# Altium PCB main.PcbDoc (part 2 of 2)
Units mm, origin at the board's own origin, x right, y up, seen from the top; angles counter-clockwise.
Board outline 50 x 70 mm, 6 copper layers (Layer 1 SIG, Layer 2 GND, Layer 3 SIG PWR, Layer 4 SIG PWR, Layer 5 GND, Layer 6 SIG), stack 1.546 mm thick; 153 components, 145 nets, 599 pads, 426 vias.
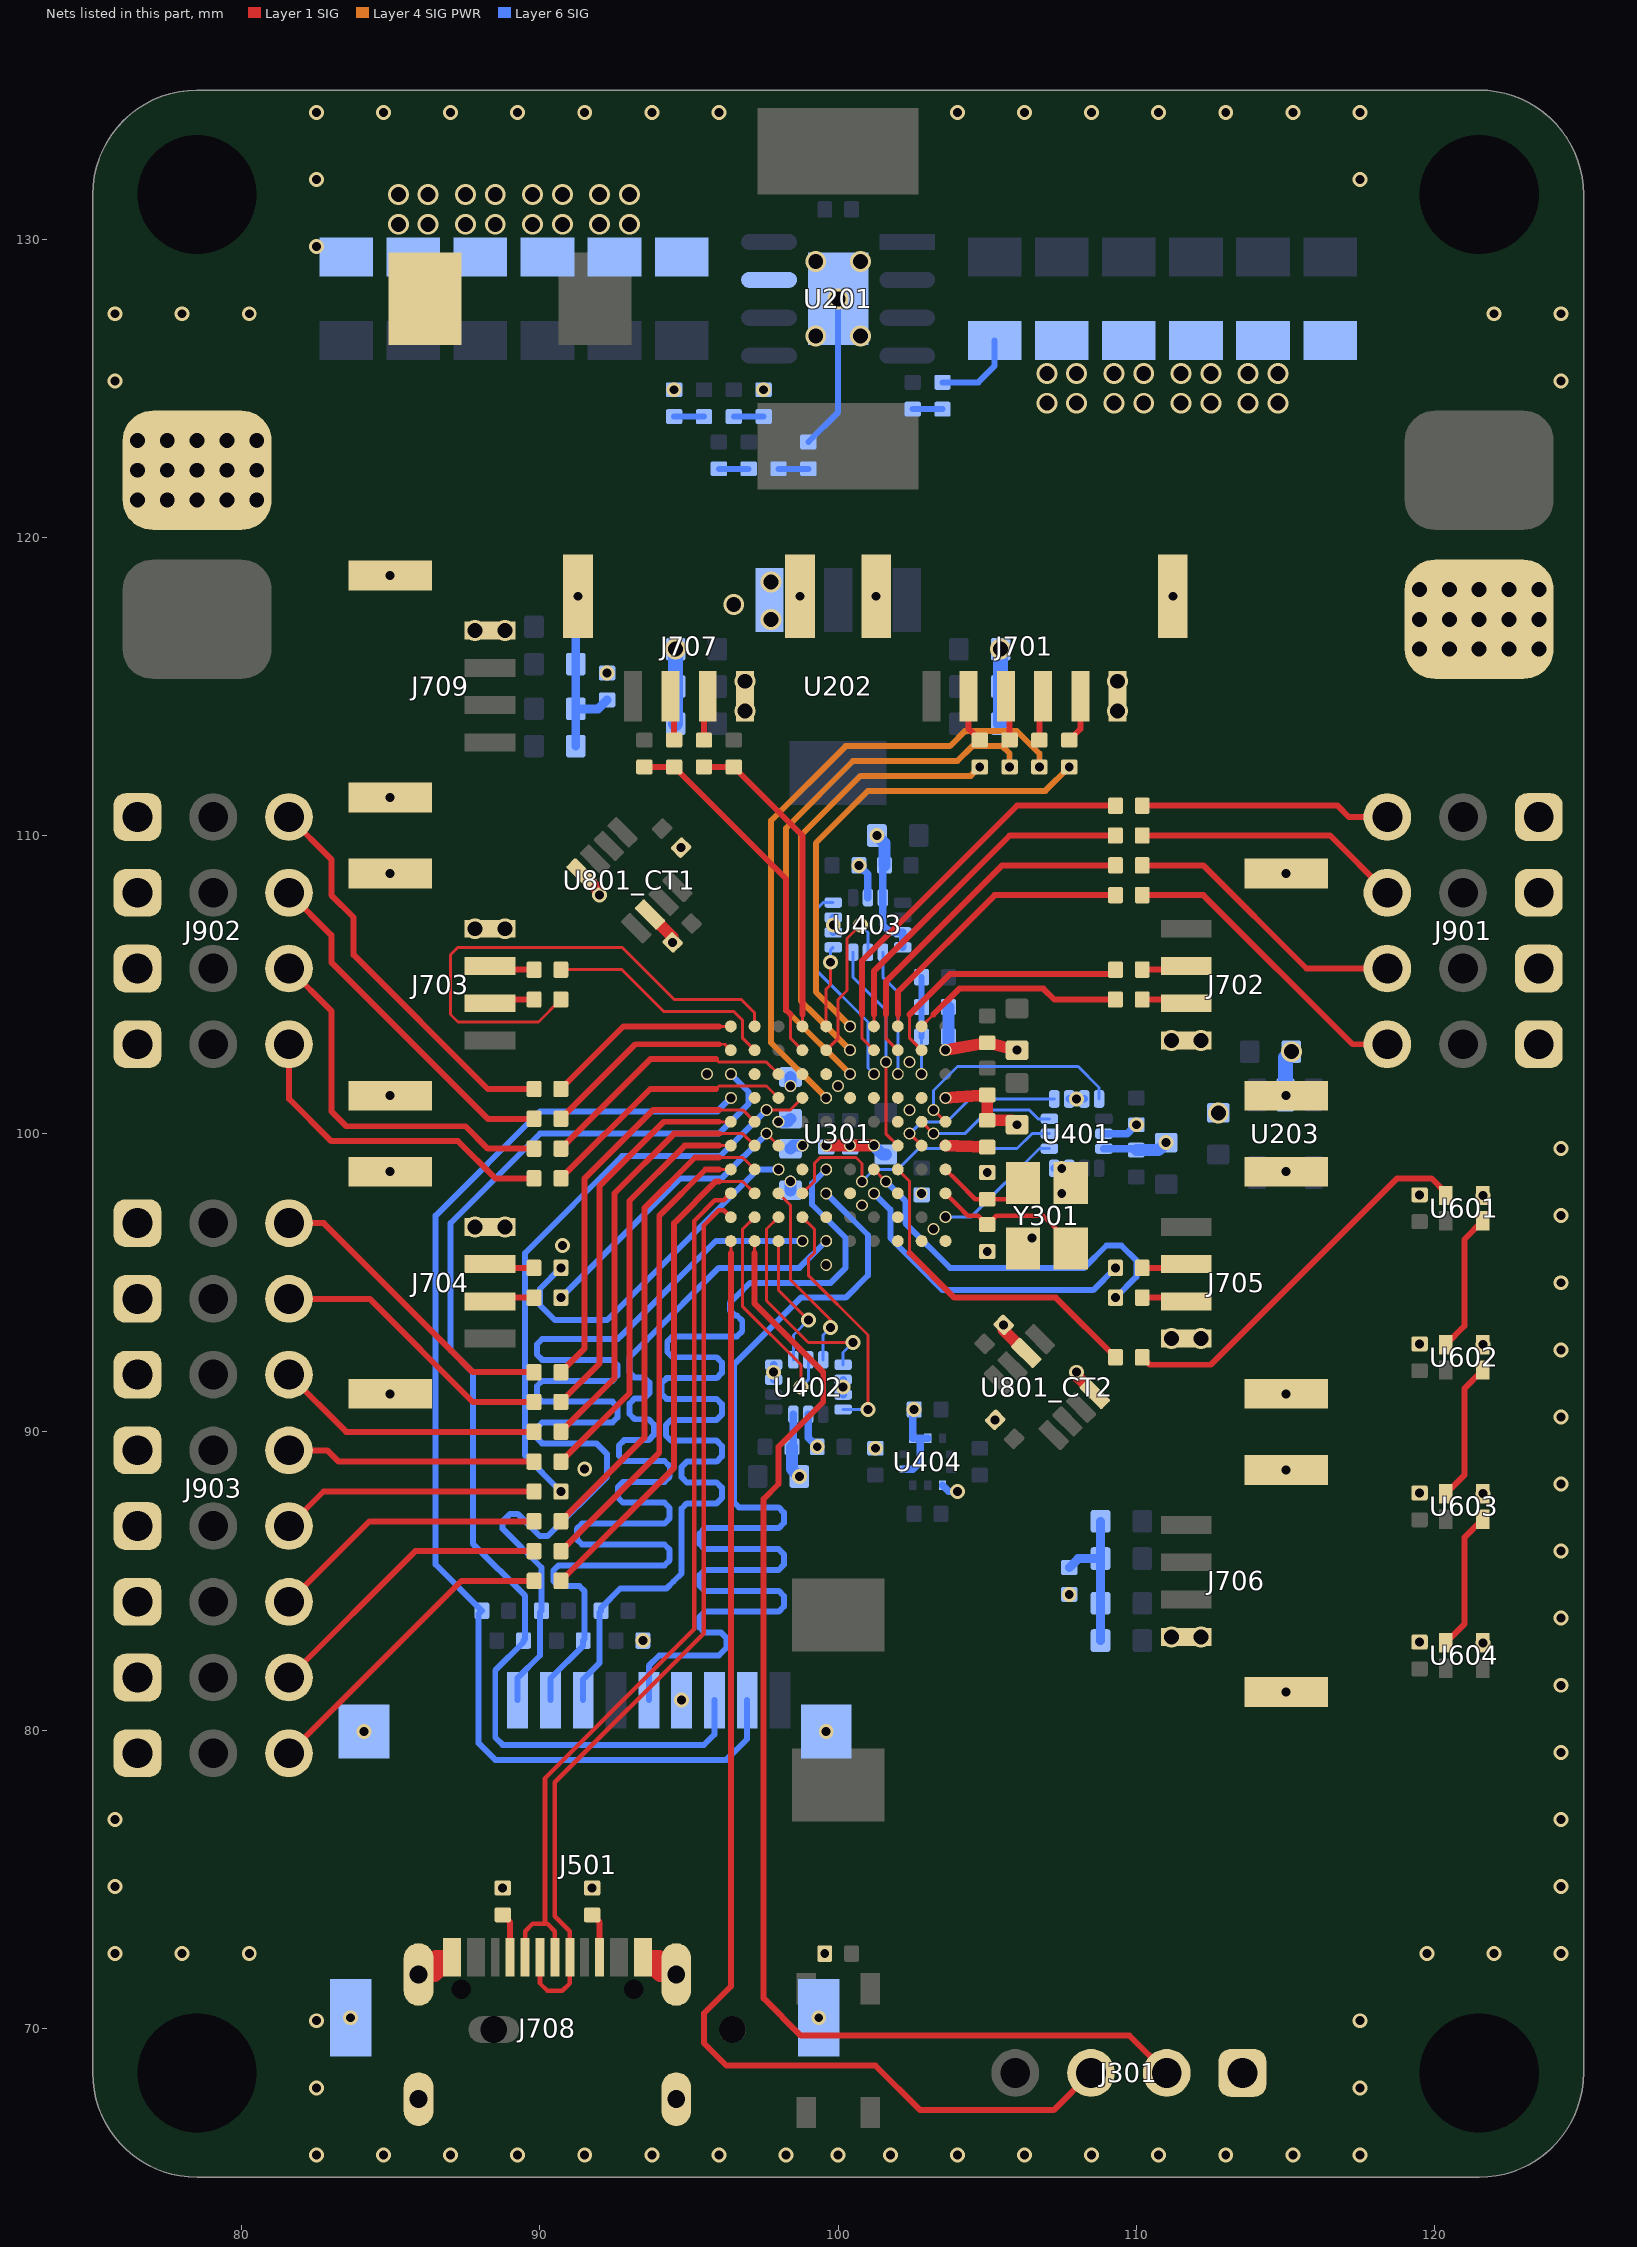
[diagram p6: the nets of this part, all layers, seen from the top]

## Via types
v1: diameter 0.5/0/0/0/0/0.5 (per signal layer), hole 0.3, Layer 1 SIG to Layer 6 SIG, tented both sides, 192 vias
v2: diameter 0.7/0/0/0/0/0.7 (per signal layer), hole 0.5, Layer 1 SIG to Layer 6 SIG, tented both sides, 185 vias
v3: diameter 0.4/0/0/0/0/0.4 (per signal layer), hole 0.3, Layer 1 SIG to Layer 6 SIG, tented both sides, 41 vias
v4: diameter 0.5/0/0/0.5/0/0.5 (per signal layer), hole 0.3, Layer 1 SIG to Layer 6 SIG, tented both sides, 4 vias
v5: diameter 0.4/0/0/0.4/0/0.4 (per signal layer), hole 0.3, Layer 1 SIG to Layer 6 SIG, tented both sides, 4 vias

## Nets (pads, with @x,y where several pads share a name; then routed paths per layer and width w, separated by ;. In a path a pad name is that pad's centre, name@x,y a point inside that pad or via, vN(x,y) a via of type N, cw(c..) or ccw(c..) an arc to the next point about the centre after c; other vN are vias at no path point) (continued)
GND: C201.2 C203.2 C204.2 C205.2 C206.2 C207.2 C208.2 C209.2 C210.2 C211.2 C212.2 C213.2 C214.2 C216.2 C217.2 C218.2 C219.2 C220.2 C221.2 C222.2 C223.2 C224.2 C225.2 C301.2 C302.2 C303.2 C304.2 C305.2 C306.2 C307.2 C308.2 C309.2 C310.2 C311.2 C312.2 C313.2 C401.2 C402.2 C403.2 C404.2 C405.2 C406.2 C407.2 C408.2 C409.2 C410.2 C411.2 C501.2 C601.2 C602.2 C603.2 C604.2 C801_CT1.2 C801_CT2.2 C802_CT1.2 C802_CT2.2 C803_CT1.2 C803_CT2.2 D202.2 J301.1 J501.6 J501.10 J501.11 J501.12 J501.13 J701.6 J701.7 J701.8 J702.4 J702.5 J702.6 J703.4 J703.5 J703.6 J704.4 J704.5 J704.6 J705.4 J705.5 J705.6 J706.4 J706.5 J706.6 J707.4 J707.5 J707.6 J708.1 J708.2 J708.3 J708.4 J708.A1B12 J708.B1A12 J709.4 J709.5 J709.6 J901.1 J901.4 J901.7 J901.10 J902.1 J902.4 J902.7 J902.10 J903.1 J903.4 J903.7 J903.10 J903.13 J903.16 J903.19 J903.22 pad.PW@78.5,122.25 pad.PW@121.5,117.25 R202.2 R207.2 R209.2 R301.2 R717.2 R718.2 U201.7 U201.9 U202.1 U203.2 U301.C2 U301.E4 U301.E5 U301.E6 U301.G1 U301.J1 U401.2 U401.3 U401.6 U401.7 U401.10 U401.11 U402.2 U402.3 U402.6 U402.7 U402.10 U402.11 U403.2 U403.3 U403.6 U403.7 U403.10 U403.11 U404.3 U404.6 U404.8 U404.9 U601.3 U602.3 U603.3 U604.3 U801_CT1.2 U801_CT1.8 U801_CT2.2 U801_CT2.8 Y301.2 Y301.4 | length 52.9
  Layer 1 SIG w0.4: U801_CT1.8@91.391,108.73 92,108.121 v1(92,108) ; U801_CT1.2@93.689,107.351 94.45,106.591 v1(94.45,106.414) ; v3(99.6,99.6) v3(100.4,99.6) v3(101.2,99.6) ; v3(103.6,101.2) 104,101.229 C307.2@105,101.3 C311.2@105,100.45 105.85,100.45 v1(106,100.3) ; v3(103.6,102.8) 104,102.871 C304.2@105,103.05 v1(106,102.8) ; v1(105.55,93.586) 105.55,93.409 U801_CT2.2@106.311,92.649 ; v1(108,92) 108,91.879 U801_CT2.8@108.609,91.27
  Layer 1 SIG w0.5: J708.1@85.93,71.801 86.508,72.379 J708.A1B12@87.05,72.379 86.472,71.801 J708.1@85.93,71.801 ; J708.B1A12@93.45,72.379 94.028,71.801 J708.2@94.57,71.801 93.992,72.379 J708.B1A12@93.45,72.379
  Layer 6 SIG w0.2: R209.2@99,123.2 100,124.2 v2(100,128) ; R207.2@103.5,125.2 104.7,125.2 105.25,125.75 C203.2@105.25,126.6
  Layer 6 SIG w0.25: U402.10@97.835,91.75 U402.11@97.835,92.25 ; C404.2@98.45,89.5 98.5,89.55 U402.7@98.5,90.585 ; U402.6@99,90.585 99,89.8 v1(99.3,89.5) ; U403.2@99.835,106.75 U403.3@99.835,107.25 ; U402.3@100.165,91.25 U402.2@100.165,91.75 ; v1(100.7,109) 101,108.7 U403.6@101,107.915 ; C407.2@101.55,109 101.5,108.95 U403.7@101.5,107.915 101.5,107 101.75,106.75 U403.10@102.165,106.75 U403.11@102.165,106.25 ; U404.6@102.213,88.75 102.5,88.75 102.75,89 102.75,89.787 ; v1(102.55,90.75) 102.5,90.75 U404.8@102.5,89.787 102.75,89.787 ; U404.9@103,89.787 102.75,89.787 ; U404.3@103.5,88.213 103.713,88 v1(104,88) ; U401.11@107.25,98.835 U401.10@107.75,98.835 ; U401.2@107.75,101.165 U401.3@108.25,101.165 ; U401.7@108.915,99.5 109.95,99.5 C401.2@110,99.45 ; U401.6@108.915,100 109.7,100 v1(110,100.3)
  Layer 6 SIG w0.4: C309.2@98.4,98.1 v3(98.4,98.4) ; v3(98.4,101.6) C310.2@98.4,101.9 ; C404.2@98.45,89.5 98.45,88.75 v1(98.7,88.5) ; v3(101.2,99.6) 101.5,99.3 C308.2@101.6,99.3 ; v1(101.3,110) 101.55,109.75 C407.2@101.55,109 ; v3(103.6,102.8) 103.7,102.9 C201.2@103.7,103.25 R202.2@103.7,104.25 ; C401.2@110,99.45 110.75,99.45 v1(111,99.7)
  Layer 6 SIG w0.5: C223.2@94.55,113.75 C222.2@94.55,115 v2(94.55,116.25) ; C218.2@105.45,113.75 v2(105.45,116.25) ; U203.2@115,101.3 115,102.55 v2(115.2,102.75)
  other v1: 82.5,65.75 84.75,65.75 87,65.75 89.25,65.75 91.5,65.75 93.75,65.75 96,65.75 98.25,65.75 100,65.75 101.75,65.75 104,65.75 106.25,65.75 108.5,65.75 110.75,65.75 113,65.75 115.25,65.75 117.5,65.75 82.5,68 117.5,68 82.5,70.25 117.5,70.25 83.65,70.35 99.35,70.35 75.75,72.5 78,72.5 80.25,72.5 99.55,72.5 119.75,72.5 122,72.5 124.25,72.5 88.75,74.7 91.75,74.7 75.75,74.75 124.25,74.75 75.75,77 124.25,77 124.25,79.25 84.1,79.95 99.6,79.95 94.75,81 115.025,81.275 124.25,81.5 121.625,82.925 119.5,82.95 93.45,83 124.25,83.75 107.75,84.55 124.25,86 121.625,87.925 119.5,87.95 124.25,88.25 115.025,88.725 91.5,88.75 101.25,89.45 105.268,90.404 124.25,90.5 84.975,91.275 115.025,91.275 100.165,91.5 97.835,92 124.25,92.75 121.625,92.925 119.5,92.95 124.25,95 105,96.05 90.75,96.25 106.5,96.5 124.25,97.25 121.625,97.925 119.5,97.95 107.5,98 105,98.7 84.975,98.725 115.025,98.725 107.5,98.835 124.25,99.5 108,101.165 84.975,101.275 115.025,101.275 99.835,107 84.975,108.725 115.025,108.725 94.732,109.596 84.975,111.275 92.25,115.45 91.275,118.025 98.725,118.025 101.275,118.025 111.225,118.025 84.975,118.725 94.5,124.95 97.5,124.95 75.75,125.25 124.25,125.25 75.75,127.5 78,127.5 80.25,127.5 122,127.5 124.25,127.5 82.5,129.75 82.5,132 117.5,132 82.5,134.25 84.75,134.25 87,134.25 89.25,134.25 91.5,134.25 93.75,134.25 96,134.25 104,134.25 106.25,134.25 108.5,134.25 110.75,134.25 113,134.25 115.25,134.25 117.5,134.25
  other v2: 111.175,83.125 112.175,83.125 111.175,93.125 112.175,93.125 87.825,96.875 88.825,96.875 112.75,100.7 111.175,103.125 112.175,103.125 87.825,106.875 88.825,106.875 96.875,114.175 109.375,114.175 96.875,115.175 109.375,115.175 119.5,116.25 120.5,116.25 121.5,116.25 122.5,116.25 123.5,116.25 87.825,116.875 88.825,116.875 97.75,117.25 119.5,117.25 120.5,117.25 121.5,117.25 122.5,117.25 123.5,117.25 96.5,117.75 119.5,118.25 120.5,118.25 121.5,118.25 122.5,118.25 123.5,118.25 97.75,118.5 76.5,121.25 77.5,121.25 78.5,121.25 79.5,121.25 80.5,121.25 76.5,122.25 77.5,122.25 78.5,122.25 79.5,122.25 80.5,122.25 76.5,123.25 77.5,123.25 78.5,123.25 79.5,123.25 80.5,123.25 107,124.5 108,124.5 109.25,124.5 110.25,124.5 111.5,124.5 112.5,124.5 113.75,124.5 114.75,124.5 107,125.5 108,125.5 109.25,125.5 110.25,125.5 111.5,125.5 112.5,125.5 113.75,125.5 114.75,125.5 99.25,126.75 100.75,126.75 99.25,129.25 100.75,129.25 85.25,130.5 86.25,130.5 87.5,130.5 88.5,130.5 89.75,130.5 90.75,130.5 92,130.5 93,130.5 85.25,131.5 86.25,131.5 87.5,131.5 88.5,131.5 89.75,131.5 90.75,131.5 92,131.5 93,131.5
  other v3: 99.6,95.6 103.2,96.8 100.8,97.6 102.8,98 102.4,100.8 100,101.6 95.6,102 102.4,102.4
HSE_IN: C312.1 U301.C1 Y301.1 | length 5.3
  Layer 1 SIG w0.15: U301.C1@103.6,98 104,97.6 104.35,97.25 104.7,97.25 C312.1@105,96.95 105.3,97.25 106.872,97.25 107.8,96.322 Y301.1@107.8,96.15
HSE_OUT: C313.1 U301.D1 Y301.3 | length 3.2
  Layer 1 SIG w0.15: U301.D1@103.6,98.8 104,98.4 104.6,97.8 C313.1@105,97.8 105.65,97.8 Y301.3@106.2,98.35
I2C2.SCL: R713.2 R715.1 U301.J7 | length 12.3
  Layer 1 SIG w0.1: 98.4,104 98.4,103.2 U301.J7@98.8,102.8
  Layer 1 SIG w0.2: R713.2@93.5,112.3 R715.1@94.5,112.3 98.25,108.55 98.25,104.15 98.4,104
I2C2.SDA: R714.2 R716.1 U301.K7 | length 10.7
  Layer 1 SIG w0.1: U301.K7@98.8,103.6 98.8,104
  Layer 1 SIG w0.2: R716.1@95.5,112.3 R714.2@96.5,112.3 98.8,110 98.8,104
IMU1_SPI2.CS: U301.B1 U401.12 | length 4.4
  Layer 6 SIG w0.1: v3(103.6,97.2) 104,97.2 104.45,97.2 106.75,99.5 U401.12@107.085,99.5
IMU1_SPI2.INT: U301.F1 U401.4 | length 7.8
  Layer 1 SIG w0.1: v3(103.2,100.8) U301.F1@103.6,100.4
  Layer 6 SIG w0.1: v3(103.2,100.8) 103.2,101.45 104,102.25 108.05,102.25 108.75,101.55 U401.4@108.75,101.165
IMU1_SPI2.MISO: U301.E2 U401.1 | length 5.9
  Layer 1 SIG w0.1: v3(102.4,100) U301.E2@102.8,99.6
  Layer 6 SIG w0.1: v3(102.4,100) 102.8,100.4 103.65,100.4 104,100.75 104.415,101.165 U401.1@107.25,101.165
IMU1_SPI2.MOSI: U301.F2 U401.14 | length 4.9
  Layer 1 SIG w0.1: U301.F2@102.8,100.4 v3(103.2,100)
  Layer 6 SIG w0.1: v3(103.2,100) 104,100 104.25,100 105.05,100.8 106.4,100.8 106.7,100.5 U401.14@107.085,100.5
IMU1_SPI2.SCK: U301.C7 U401.13 | length 10.5
  Layer 1 SIG w0.1: U301.C7@98.8,98 99.2,98.4 99.2,99 99.4,99.2 100.6,99.2 100.8,99 v3(100.8,98.4)
  Layer 6 SIG w0.1: v3(100.8,98.4) 101.2,98.8 102,98.8 102.7,99.5 104,99.5 106,99.5 106.5,100 U401.13@107.085,100
IMU2_SPI3.CS: U301.A8 U402.12 | length 4.6
  Layer 1 SIG w0.1: U301.A8@98,96.4 98,94.75 v1(99,93.75)
  Layer 6 SIG w0.1: U402.12@98.5,92.415 98.5,93.25 v1(99,93.75)
IMU2_SPI3.INT: U301.B7 U402.4 | length 8.4
  Layer 1 SIG w0.1: U301.B7@98.8,97.2 99.2,96.8 99.2,96 99,95.8 99,95.25 101,93.25 v1(101,90.75)
  Layer 6 SIG w0.1: U402.4@100.165,90.75 v1(101,90.75)
IMU2_SPI3.MISO: U301.B8 U402.1 | length 7.3
  Layer 1 SIG w0.1: U301.B8@98,97.2 97.6,96.8 97.6,94.4 99,93 v1(100.5,93)
  Layer 6 SIG w0.1: U402.1@100.165,92.25 100.165,92.665 v1(100.5,93)
IMU2_SPI3.MOSI: U301.C8 U402.14 | length 6.4
  Layer 1 SIG w0.1: U301.C8@98,98 98.4,97.6 98.4,95.1 99.75,93.75 v1(99.75,93.5)
  Layer 6 SIG w0.1: U402.14@99.5,92.415 99.5,93.25 v1(99.75,93.5)
IMU2_SPI3.SCK: U301.B9 U402.13 | length 7.7
  Layer 1 SIG w0.1: U301.B9@97.2,97.2 96.8,96.8 96.8,96 96.8,94.2 98.75,92.25 v1(98.75,91.5)
  Layer 6 SIG w0.1: v1(98.75,91.5) 99,91.75 U402.13@99,92.415
IMU3_SPI4.CS: U301.H3 U403.12 | length 4.3
  Layer 6 SIG w0.1: U403.12@101.5,106.085 101.5,105.25 102,104.75 102,104 v3(102,102)
IMU3_SPI4.INT: U301.H4 U403.4 | length 7
  Layer 6 SIG w0.1: U403.4@99.835,107.75 99.5,107.75 99.2,107.45 99.2,105.55 101,103.75 101,102.2 v3(101.2,102)
IMU3_SPI4.MISO: U301.K6 U403.1 | length 2.7
  Layer 1 SIG w0.1: U301.K6@99.6,103.6 99.6,104 99.6,104.85 99.75,105 v1(99.75,105.75)
  Layer 6 SIG w0.1: v1(99.75,105.75) 99.75,106.165 U403.1@99.835,106.25
IMU3_SPI4.MOSI: U301.E3 U403.14 | length 7.1
  Layer 1 SIG w0.1: v3(101.6,102.4) 101.6,100 U301.E3@102,99.6
  Layer 6 SIG w0.1: U403.14@100.5,106.085 100.5,105.25 101.6,104.15 101.6,104 v3(101.6,102.4)
IMU3_SPI4.SCK: U301.J6 U403.13 | length 5.7
  Layer 1 SIG w0.1: U301.J6@99.6,102.8 100,103.2 100,104.5 100.3,104.8 100.3,106.55 v1(100.75,107)
  Layer 6 SIG w0.1: v1(100.75,107) 101,106.75 U403.13@101,106.085
NetC215_2: C215.2 C217.1 | length 1
  Layer 6 SIG w0.2: C217.1@94.5,124.05 C215.2@95.5,124.05
NetC216_1: C216.1 R204.2 | length 1
  Layer 6 SIG w0.2: R204.2@96.5,124.05 C216.1@97.5,124.05
NetC802_CT1_1: C802_CT1.1 R801_CT1.2 R802_CT1.2 R803_CT1.1 R804_CT1.1 | length 5.2
  Layer 6 SIG w0.3: R802_CT1.2@91.2,113 R801_CT1.2@91.2,114.25 ; R804_CT1.1@91.2,117 R803_CT1.1@91.2,115.75 R801_CT1.2@91.2,114.25 ; C802_CT1.1@92.25,114.55 91.95,114.25 R801_CT1.2@91.2,114.25
NetC802_CT2_1: C802_CT2.1 R801_CT2.2 R802_CT2.2 R803_CT2.1 R804_CT2.1 | length 5.2
  Layer 6 SIG w0.3: C802_CT2.1@107.75,85.45 108.05,85.75 R801_CT2.2@108.8,85.75 ; R804_CT2.1@108.8,83 R803_CT2.1@108.8,84.25 R801_CT2.2@108.8,85.75 ; R802_CT2.2@108.8,87 R801_CT2.2@108.8,85.75
NetJ701_2: J701.2 R701.2 | length 1.6
  Layer 1 SIG w0.2: J701.2@104.375,114.675 104.375,113.575 R701.2@104.75,113.2
NetJ701_3: J701.3 R704.2 | length 1.5
  Layer 1 SIG w0.2: J701.3@105.625,114.675 105.75,114.55 R704.2@105.75,113.2
NetJ701_4: J701.4 R707.2 | length 1.5
  Layer 1 SIG w0.2: R707.2@106.75,113.2 106.75,114.55 J701.4@106.875,114.675
NetJ701_5: J701.5 R708.2 | length 1.6
  Layer 1 SIG w0.2: R708.2@107.75,113.2 108.125,113.575 J701.5@108.125,114.675
NetJ702_2: J702.2 R702.2 | length 1.5
  Layer 1 SIG w0.2: R702.2@110.2,105.5 111.55,105.5 J702.2@111.675,105.625
NetJ702_3: J702.3 R705.2 | length 1.5
  Layer 1 SIG w0.2: R705.2@110.2,104.5 111.55,104.5 J702.3@111.675,104.375
NetJ703_2: J703.2 R703.2 | length 1.5
  Layer 1 SIG w0.2: J703.2@88.325,104.375 88.45,104.5 R703.2@89.8,104.5
NetJ703_3: J703.3 R706.2 | length 1.5
  Layer 1 SIG w0.2: J703.3@88.325,105.625 88.45,105.5 R706.2@89.8,105.5
NetJ704_2: J704.2 R709.2 | length 1.5
  Layer 1 SIG w0.2: J704.2@88.325,94.375 88.45,94.5 R709.2@89.8,94.5
NetJ704_3: J704.3 R711.2 | length 1.5
  Layer 1 SIG w0.2: J704.3@88.325,95.625 88.45,95.5 R711.2@89.8,95.5
NetJ705_2: J705.2 R710.2 | length 1.5
  Layer 1 SIG w0.2: R710.2@110.2,95.5 111.55,95.5 J705.2@111.675,95.625
NetJ705_3: J705.3 R712.2 | length 1.5
  Layer 1 SIG w0.2: R712.2@110.2,94.5 111.55,94.5 J705.3@111.675,94.375
NetJ707_2: J707.2 R715.2 | length 1.5
  Layer 1 SIG w0.2: J707.2@94.375,114.675 94.5,114.55 R715.2@94.5,113.2
NetJ707_3: J707.3 R716.2 | length 1.5
  Layer 1 SIG w0.2: R716.2@95.5,113.2 95.5,114.55 J707.3@95.625,114.675
NetJ708_A5: J708.A5 R717.1 | length 1.5
  Layer 1 SIG w0.2: R717.1@88.75,73.8 89,73.55 J708.A5@89,72.379
NetJ708_B5: J708.B5 R718.1 | length 1.5
  Layer 1 SIG w0.2: R718.1@91.75,73.8 92,73.55 J708.B5@92,72.379
NetR203_2: R203.2 R206.1 | length 1
  Layer 6 SIG w0.2: R203.2@96,122.3 R206.1@97,122.3
NetR205_2: R205.2 R207.1 | length 1
  Layer 6 SIG w0.2: R205.2@102.5,124.3 R207.1@103.5,124.3
NetR208_2: R208.2 R209.1 | length 1
  Layer 6 SIG w0.2: R208.2@98,122.3 R209.1@99,122.3
NetR601_2: R601.2 U601.4 | length 13.2
  Layer 1 SIG w0.2: R601.2@110.2,92.5 110.45,92.25 112.5,92.25 118.75,98.5 119.9,98.5 120.375,98.025 U601.4@120.375,97.925
NetU601_1: U601.1 U602.4 | length 4.7
  Layer 1 SIG w0.2: U602.4@120.375,92.925 121,93.55 121,96.45 U601.1@121.625,97.075
NetU602_1: U602.1 U603.4 | length 4.7
  Layer 1 SIG w0.2: U603.4@120.375,87.925 121,88.55 121,91.45 U602.1@121.625,92.075
NetU603_1: U603.1 U604.4 | length 4.7
  Layer 1 SIG w0.2: U604.4@120.375,82.925 121,83.55 121,86.45 U603.1@121.625,87.075
NRST: C311.1 U301.E1 | length 1.4
  Layer 1 SIG w0.4: U301.E1@103.6,99.6 104,99.586 C311.1@105,99.55
PA0: U301.G2
PA4: U301.G3
PA13: J301.3 U301.A10 | length 41.7
  Layer 1 SIG w0.1: 96.4,96 U301.A10@96.4,96.4
  Layer 1 SIG w0.2: 96.4,96 96.4,71.4 95.5,70.5 95.5,69.5 96.25,68.75 101.25,68.75 102.75,67.25 107.23,67.25 J301.3@108.48,68.5
PA14: J301.2 U301.A9 | length 41.7
  Layer 1 SIG w0.1: 97.2,96 U301.A9@97.2,96.4
  Layer 1 SIG w0.2: 97.2,96 97.2,94.3 99.5,92 99.5,91 98,89.5 98,88.25 97.5,87.75 97.5,71 98.75,69.75 109.77,69.75 J301.2@111.02,68.5
PB2: U301.G5
PB5: U301.C5
PC3: U301.F3
PC4: U301.G4
PC13: U301.A2
PC14: U301.A1
PD4: U301.D7
PD5: U301.B6
PD10: U301.H9
PD11: U301.G9
PE2: U301.A3
PE3: U301.B3
PE4: U301.C3
PE11: U301.H6
PE15: U301.H7
PWM.SERVO1: R901.1 U301.K3 | length 9.8
  Layer 1 SIG w0.1: U301.K3@102,103.6 102,104
  Layer 1 SIG w0.2: 102,104 102,104.75 105.25,108 R901.1@109.3,108
PWM.SERVO2: R902.1 U301.J3 | length 11.8
  Layer 1 SIG w0.1: 101.6,104 101.6,103.2 U301.J3@102,102.8
  Layer 1 SIG w0.2: 101.6,104 101.6,105.1 105.5,109 R902.1@109.3,109
PWM.SERVO3: R903.1 U301.K4 | length 11.8
  Layer 1 SIG w0.1: U301.K4@101.2,103.6 101.2,104
  Layer 1 SIG w0.2: 101.2,104 101.2,105.45 105.75,110 R903.1@109.3,110
PWM.SERVO4: R904.1 U301.J4 | length 13.8
  Layer 1 SIG w0.1: 100.8,104 100.8,103.2 U301.J4@101.2,102.8
  Layer 1 SIG w0.2: 100.8,104 100.8,105.8 106,111 R904.1@109.3,111
PWM.SERVO5: R905.1 U301.K10 | length 6.6
  Layer 1 SIG w0.1: 96,103.6 U301.K10@96.4,103.6
  Layer 1 SIG w0.2: R905.1@90.7,101.5 92.8,103.6 96,103.6
PWM.SERVO6: R906.1 U301.J10 | length 6.8
  Layer 1 SIG w0.1: 96,103 96.2,103 U301.J10@96.4,102.8
  Layer 1 SIG w0.2: R906.1@90.7,100.5 93.2,103 96,103
PWM.SERVO7: R907.1 U301.H8 | length 8.7
  Layer 1 SIG w0.1: 95.9,102.5 96,102.4 97.6,102.4 U301.H8@98,102
  Layer 1 SIG w0.2: R907.1@90.7,99.5 93.7,102.5 95.9,102.5
PWM.SERVO8: R908.1 U301.G8 | length 8.7
  Layer 1 SIG w0.1: 95.9,101.5 96,101.6 97.6,101.6 U301.G8@98,101.2
  Layer 1 SIG w0.2: R908.1@90.7,98.5 93.7,101.5 95.9,101.5
PWM.SERVO9: R909.1 U301.F9 | length 13.6
  Layer 1 SIG w0.1: 96,100.8 96.8,100.8 U301.F9@97.2,100.4
  Layer 1 SIG w0.2: R909.1@90.7,92 91.5,92.8 91.5,98.5 93.8,100.8 96,100.8
PWM.SERVO10: R910.1 U301.F10 | length 13.1
  Layer 1 SIG w0.1: 96,100.4 U301.F10@96.4,100.4
  Layer 1 SIG w0.2: R910.1@90.7,91 92,92.3 92,98.25 94.15,100.4 96,100.4
PWM.SERVO11: R911.1 U301.E9 | length 14.4
  Layer 1 SIG w0.1: 96,100 96.8,100 U301.E9@97.2,99.6
  Layer 1 SIG w0.2: R911.1@90.7,90 92.5,91.8 92.5,98 94.5,100 96,100
PWM.SERVO12: R912.1 U301.E10 | length 13.9
  Layer 1 SIG w0.1: 96,99.6 U301.E10@96.4,99.6
  Layer 1 SIG w0.2: R912.1@90.7,89 93,91.3 93,97.75 94.85,99.6 96,99.6
PWM.SERVO13: R913.1 U301.G7 | length 20
  Layer 1 SIG w0.1: v3(97.6,100.8) 98.4,100.8 U301.G7@98.8,101.2
  Layer 6 SIG w0.2: v1(90.7,88) 89.5,89.2 89.5,96 92.75,99.25 96,99.25 96.05,99.25 v3(97.6,100.8)
PWM.SERVO14: R914.1 U301.D9 | length 16.2
  Layer 1 SIG w0.1: 96,99.2 96.8,99.2 U301.D9@97.2,98.8
  Layer 1 SIG w0.2: R914.1@90.7,87 93.5,89.8 93.5,97.5 95.2,99.2 96,99.2
PWM.SERVO15: R915.1 U301.D10 | length 15.7
  Layer 1 SIG w0.1: 96,98.8 U301.D10@96.4,98.8
  Layer 1 SIG w0.2: R915.1@90.7,86 94,89.3 94,97.25 95.55,98.8 96,98.8
PWM.SERVO16: R916.1 U301.C9 | length 17
  Layer 1 SIG w0.1: 96,98.4 96.8,98.4 U301.C9@97.2,98
  Layer 1 SIG w0.2: R916.1@90.7,85 94.5,88.8 94.5,97 95.9,98.4 96,98.4
RGB: R601.1 U301.D3 | length 11.3
  Layer 1 SIG w0.1: U301.D3@102,98.8 102.4,98.4 102.4,96
  Layer 1 SIG w0.2: 102.4,96 103.9,94.5 107.3,94.5 R601.1@109.3,92.5
SERIAL2.RX: R705.1 U301.K2 | length 7.2
  Layer 1 SIG w0.1: U301.K2@102.8,103.6 103.2,104
  Layer 1 SIG w0.2: 103.2,104 104.065,104.865 106.885,104.865 107.25,104.5 R705.1@109.3,104.5
SERIAL2.TX: R702.1 U301.J2 | length 8.9
  Layer 1 SIG w0.1: 102.4,104 102.4,103.2 U301.J2@102.8,102.8
  Layer 1 SIG w0.2: 102.4,104 103.759,105.359 109.159,105.359 R702.1@109.3,105.5
SERIAL3.RX: R706.1 U301.J9 | length 8
  Layer 1 SIG w0.1: R706.1@90.7,105.5 92.75,105.5 94.15,104.1 96.5,104.1 96.8,103.8 96.8,103.2 U301.J9@97.2,102.8
SERIAL3.TX: R703.1 U301.K9 | length 17.8
  Layer 1 SIG w0.1: R703.1@90.7,104.5 89.95,103.75 87.25,103.75 87,104 87,106 87.25,106.25 92.75,106.25 94.5,104.5 96.75,104.5 97.2,104.05 97.2,104 U301.K9@97.2,103.6
SERIAL4.RX: R711.1 U301.D8 | length 11.8
  Layer 6 SIG w0.2: v1(90.7,95.5) 90,94.8 90,94.25 90.5,93.75 92.25,93.75 97.3,98.8 v3(98,98.8)
SERIAL4.TX: R709.1 U301.E8 | length 9.7
  Layer 1 SIG w0.1: v3(97.6,100) U301.E8@98,99.6
  Layer 6 SIG w0.2: v1(90.7,94.5) 94.7,98.5 96,98.5 96.1,98.5 v3(97.6,100)
SERIAL7.CTS: R707.1 U301.G6 | length 21.1
  Layer 4 SIG PWR w0.2: v5(99.6,101.2) 97.75,103.05 97.75,110.5 100.25,113 103.75,113 104.25,113.5 106,113.5 106.75,112.75 v4(106.75,112.3)
SERIAL7.RTS: R708.1 U301.K5 | length 16.2
  Layer 4 SIG PWR w0.2: v5(100.4,103.6) 100,104 99.25,104.75 99.25,109.75 101,111.5 106.95,111.5 v4(107.75,112.3)
SERIAL7.RX: R704.1 U301.H5 | length 18.3
  Layer 4 SIG PWR w0.2: v5(100.4,102) 98.25,104.15 98.25,110.25 100.5,112.5 104,112.5 104.5,113 105.5,113 105.75,112.75 v4(105.75,112.3)
SERIAL7.TX: R701.1 U301.J5 | length 14.8
  Layer 4 SIG PWR w0.2: v5(100.4,102.8) 99.2,104 98.75,104.45 98.75,110 100.75,112 104.45,112 v4(104.75,112.3)
SERIAL8.RX: R712.1 U301.D4 | length 12.7
  Layer 1 SIG w0.1: U301.D4@101.2,98.8 v3(101.6,98.4)
  Layer 6 SIG w0.2: v3(101.6,98.4) 102.25,97.75 102.25,97 103.75,95.5 108.25,95.5 109,96.25 109.5,96.25 110,95.75 110,95.2 v1(109.3,94.5)
SERIAL8.TX: R710.1 U301.C4 | length 10.3
  Layer 6 SIG w0.2: v3(101.2,98) 101.75,97.45 101.75,96.5 102.25,96 103.5,94.75 108.55,94.75 v1(109.3,95.5)
SERVO1: J901.3 R901.2 | length 10.3
  Layer 1 SIG w0.2: R901.2@110.2,108 112.25,108 117.25,103 J901.3@118.42,103
SERVO2: J901.6 R902.2 | length 9.7
  Layer 1 SIG w0.2: R902.2@110.2,109 112.25,109 115.71,105.54 J901.6@118.42,105.54
SERVO3: J901.9 R903.2 | length 9
  Layer 1 SIG w0.2: R903.2@110.2,110 116.5,110 J901.9@118.42,108.08
SERVO4: J901.12 R904.2 | length 8.4
  Layer 1 SIG w0.2: R904.2@110.2,111 116.75,111 117.13,110.62 J901.12@118.42,110.62
SERVO5: J902.3 R905.2 | length 13.4
  Layer 1 SIG w0.2: J902.3@81.58,110.62 83,109.2 83,108 83.75,107.25 83.75,106 88.25,101.5 R905.2@89.8,101.5
SERVO6: J902.6 R906.2 | length 11.9
  Layer 1 SIG w0.2: J902.6@81.58,108.08 83,106.66 83,105.75 88.25,100.5 R906.2@89.8,100.5
SERVO7: J902.9 R907.2 | length 12.7
  Layer 1 SIG w0.2: J902.9@81.58,105.54 83,104.12 83,100.75 83.5,100.25 87.5,100.25 88.25,99.5 R907.2@89.8,99.5
SERVO8: J902.12 R908.2 | length 11.2
  Layer 1 SIG w0.2: J902.12@81.58,103 81.58,101.17 83,99.75 87.25,99.75 88.5,98.5 R908.2@89.8,98.5
SERVO9: J903.3 R909.2 | length 10.3
  Layer 1 SIG w0.2: J903.3@81.58,97 82.75,97 87.75,92 R909.2@89.8,92
SERVO10: J903.6 R910.2 | length 9.7
  Layer 1 SIG w0.2: J903.6@81.58,94.46 84.29,94.46 87.75,91 R910.2@89.8,91
SERVO11: J903.9 R911.2 | length 9
  Layer 1 SIG w0.2: J903.9@81.58,91.92 83.5,90 R911.2@89.8,90
SERVO12: J903.12 R912.2 | length 8.4
  Layer 1 SIG w0.2: J903.12@81.58,89.38 82.87,89.38 83.25,89 R912.2@89.8,89
SERVO13: J903.15 R913.2 | length 8.7
  Layer 1 SIG w0.2: J903.15@81.58,86.84 82.74,88 R913.2@89.8,88
SERVO14: J903.18 R914.2 | length 9.3
  Layer 1 SIG w0.2: J903.18@81.58,84.3 84.28,87 R914.2@89.8,87
SERVO15: J903.21 R915.2 | length 10
  Layer 1 SIG w0.2: J903.21@81.58,81.76 85.82,86 R915.2@89.8,86
SERVO16: J903.24 R916.2 | length 10.6
  Layer 1 SIG w0.2: J903.24@81.58,79.22 87.36,85 R916.2@89.8,85
TF.CK: J501.5 U301.C6 | length 37.9
  Layer 6 SIG w0.2: J501.5@93.65,81 93.65,82.15 94,82.5 96,82.5 96.25,82.75 96.25,82.993 96.25,83.093 96.075,83.268 95.527,83.268 95.352,83.443 95.352,83.793 95.527,83.968 98.005,83.968 98.18,84.143 98.18,84.493 98.005,84.668 95.527,84.668 95.352,84.843 95.352,85.193 95.527,85.368 98.005,85.368 98.18,85.543 98.18,85.893 98.005,86.068 95.527,86.068 95.352,86.243 95.352,86.593 95.527,86.768 98.005,86.768 98.18,86.943 98.18,87.293 98.005,87.468 96.675,87.468 96.5,87.643 96.5,87.786 96.5,92.25 98.75,94.5 100.25,94.5 101,95.25 101,96.6 v3(99.6,98)
TF.CMD: J501.3 R501.2 U301.D6 | length 38.5
  Layer 6 SIG w0.2: J501.3@91.45,81 91.45,81.7 92,82.25 92,83.95 R501.2@92.05,84 92.05,84.099 92.701,84.75 94.25,84.75 94.48,84.98 94.75,85.25 94.75,87.427 94.925,87.602 95.925,87.602 96.1,87.777 96.1,88.127 95.925,88.302 94.927,88.302 94.752,88.477 94.752,88.827 94.927,89.002 95.925,89.002 96.1,89.177 96.1,89.527 95.925,89.702 94.395,89.702 94.22,89.877 94.22,90.227 94.395,90.402 95.925,90.402 96.1,90.577 96.1,90.927 95.925,91.102 94.248,91.102 94.073,91.277 94.073,91.627 94.248,91.802 95.925,91.802 96.1,91.977 96.1,92.327 95.925,92.502 94.443,92.502 94.268,92.677 94.268,93.027 94.443,93.202 96.609,93.202 96.784,93.377 96.784,93.727 96.609,93.902 96.544,93.902 96.369,94.077 96.369,94.325 96.786,94.743 97.044,95 99.75,95 100.25,95.5 100.25,96.5 99.125,97.625 99.125,98.325 v3(99.6,98.8)
TF.D0: J501.7 R502.2 U301.H10 | length 40.4
  Layer 6 SIG w0.2: J501.7@95.85,81 95.85,79.85 95.5,79.5 88.75,79.5 88.5,79.75 88.5,82 89.45,82.95 R502.2@89.45,83 89.5,83.05 89.5,84.5 87.75,86.25 87.75,92 87,92.75 87,97 90,100 96,100 97,101 97,101.4 v3(96.4,102)
TF.D1: J501.8 R503.2 U301.G10 | length 40.7
  Layer 6 SIG w0.2: v3(96.4,101.2) 96,100.8 95.95,100.75 90,100.75 86.5,97.25 86.5,85.55 R503.2@88.05,84 87.943,83.893 87.943,79.557 88.5,79 96.25,79 96.95,79.7 J501.8@96.95,81
TF.D2: J501.1 R504.2 U301.A7 | length 38.4
  Layer 6 SIG w0.2: J501.1@89.25,81 89.25,81.75 90,82.5 90,83.95 R504.2@90.05,84 90.05,85.45 88.75,86.75 88.75,87 89,87.25 89.25,87.25 90,86.5 90.25,86.5 92.25,88.5 92.25,89.25 91.987,89.513 91.887,89.613 90.075,89.613 89.9,89.788 89.9,90.138 90.075,90.313 92.425,90.313 92.6,90.488 92.6,90.838 92.425,91.013 90.075,91.013 89.9,91.188 89.9,91.538 90.075,91.713 92.425,91.713 92.6,91.888 92.6,92.238 92.425,92.413 90.075,92.413 89.9,92.588 89.9,92.938 90.075,93.113 92.613,93.113 92.743,93.243 95.9,96.4 v3(98.8,96.4)
TF.D3: J501.2 R505.2 U301.A6 | length 37.6
  Layer 6 SIG w0.2: J501.2@90.35,81 90.35,81.728 91.45,82.828 R505.2@91.45,83 91.5,83.05 91.5,84.301 91.5,84.648 91.325,84.823 90.625,84.823 90.45,84.998 90.45,85.348 90.625,85.523 94.175,85.523 94.35,85.698 94.35,86.048 94.175,86.223 91.414,86.223 91.239,86.398 91.239,86.748 91.414,86.923 94.175,86.923 94.35,87.098 94.35,87.448 94.175,87.623 92.784,87.623 92.609,87.798 92.609,88.148 92.784,88.323 94.177,88.323 94.352,88.498 94.352,88.848 94.177,89.023 92.825,89.023 92.65,89.198 92.65,89.548 92.825,89.723 93.645,89.723 93.82,89.898 93.82,90.248 93.645,90.423 93.175,90.423 93,90.598 93,90.948 93.175,91.123 93.498,91.123 93.673,91.298 93.673,91.648 93.498,91.823 93.175,91.823 93,91.998 93,92.5 93.566,93.066 96,95.5 98.7,95.5 v3(99.6,96.4)
USB.D_N: J708.A7 J708.B7 U301.C10 | length 30.2
  Layer 1 SIG w0.152: J708.B7@89.5,72.379 89.5,73.25 89.75,73.5 90.168,73.5 ; J708.A7@90.5,72.379 90.5,73.25 90.25,73.5 90.168,73.5 ; U301.C10@96.4,98 96.166,97.766 95.862,97.766 95.168,97.072 95.168,83.388 90.168,78.388 90.168,73.5
USB.D_P: J708.A6 J708.B6 U301.B10 | length 31
  Layer 1 SIG w0.152: J708.A6@90,72.379 90,71.5 90.25,71.25 90.75,71.25 91,71.5 J708.B6@91,72.379 91,73.25 90.5,73.75 90.5,78.25 95.5,83.25 95.5,96.934 96,97.434 96.166,97.434 U301.B10@96.4,97.2
V_SENSE: C201.1 R201.2 R202.1 U301.H2 | length 3.2
  Layer 6 SIG w0.1: v3(102.8,102) C201.1@102.8,103.25
  Layer 6 SIG w0.2: C201.1@102.8,103.25 R201.2@102.8,105.25
VCAP1: C309.1 U301.E7 | length 0.4
  Layer 6 SIG w0.4: C309.1@98.4,99.5 98.5,99.6 v3(98.8,99.6)
VCAP2: C310.1 U301.F8 | length 0.4
  Layer 6 SIG w0.4: v3(98,100.4) 98.3,100.4 C310.1@98.4,100.5
pads on no net: J501.9 J501.MH1 J501.MH2 J708.6 J708.7 J708.A8 J708.B8 SW301.1 SW301.3 U201.3 U203.4 U401.9 U402.9 U403.9 U404.7 U604.1

## Polygon pours and split planes (outlines as drawn)
no net on Top Overlay "NONET_L01_P-001" (solid): 112.29,69.77 112.29,67.23 114.83,67.23 114.83,69.77
no net on Top Overlay "NONET_L01_P-001" (solid): 122.23,111.89 122.23,101.73 124.77,101.73 124.77,111.89
no net on Top Overlay "NONET_L01_P-001" (solid): 75.23,88.11 75.23,77.95 77.77,77.95 77.77,88.11
no net on Top Overlay "NONET_L01_P-001" (solid): 75.23,98.27 75.23,88.11 77.77,88.11 77.77,98.27
no net on Top Overlay "NONET_L01_P-001" (solid): 75.23,111.89 75.23,101.73 77.77,101.73 77.77,111.89
no net on Top Overlay "NONET_L01_P-001" (solid): 75,119.75 80,119.75 ccw(c80,121.25) 81.5,121.25 81.5,123.25 ccw(c80,123.25) 80,124.75 75,124.75
no net on Top Overlay "NONET_L01_P-001" (solid): 125,119.75 120,119.75 ccw(c120,118.25) 118.5,118.25 118.5,116.25 ccw(c120,116.25) 120,114.75 125,114.75
no net on Top Overlay "NONET_L01_P-001" (solid): 100,110.75 98,106.75 100,107.75 102,106.75
no net on Top Overlay "NONET_L01_P-001" (solid): 104.325,95.675 104.325,96.725 103.275,95.675
+BATT on Layer 1 SIG "NONET_L01_P-001" (solid, remove dead copper, pour order 23): 106.5,131.75 106.75,132 115,132 123.5,123.5 123.5,121 122.75,120.25 121,120.25 115,126.25 110.5,126.25 106.5,130.25
GND on Layer 1 SIG "NONET_L01_P-001" (solid, remove dead copper, pour order 13): 87.375,126.45 87.375,127.125 90.25,130 93.25,130 93.5,130.25 93.5,131.75 93.25,132 85,132 84.5,131.5 84.5,126.875 84.925,126.45
"+5 BUCK" on Layer 1 SIG "NONET_L01_P-001" (solid, remove dead copper, pour order 12): 102.7,124.5 101.2,126 85,126 84.75,125.75 84.75,124.25 87.4,121.6 102.7,121.6
BUCK_SW on Layer 1 SIG "NONET_L01_P-001" (solid, remove dead copper, pour order 10): 90.625,129.55 93.325,129.55 97.3,133.525 97.3,134.4 102.7,134.4 102.7,131.5 97.65,126.45 90.625,126.45
+BATT on Layer 6 SIG "Layer 6 SIG-+BATT" (solid, remove dead copper, pour order 8): 101.458,128.443 101.902,128 116.65,128 117.4,128.75 117.4,130.05 115.45,132 106.3,132 103.55,129.25 101.882,129.25 101.458,128.827
"+5 USB" on Layer 6 SIG "Layer 6 SIG-+5 USB" (solid, remove dead copper, pour order 22): 87.5,73.5 87.75,73.25 97.5,73.25 101.5,77.25 101.5,78 101.25,78.25 90.75,78.25 87.5,75
GND on Layer 6 SIG "GND_L06_P020" (solid, remove dead copper, pour order 20): 98.175,118.975 96.613,118.975 94.244,116.606 94.244,116.556 94.55,116.25 94.88,116.25 95.455,116.825 98.175,116.825
BUCK_SW on Layer 6 SIG "NONET_L01_P-001" (solid, remove dead copper, pour order 11): 96,130.54 96.826,129.713 98.542,129.713 99,130.172 99,132 98.75,132.25 96.25,132.25 96,132
"+5 BUCK" on Layer 6 SIG "NONET_L01_P-001" (solid, remove dead copper, pour order 9): 82.6,127.25 82.6,125.95 84.55,124 93.7,124 95.65,125.95 95.65,127.25
GND on Layer 6 SIG "Layer 6 SIG-GND" (solid, remove dead copper, pour order 6): 98.987,124.013 101.75,121.25 112.7,121.25 117.4,125.95 117.4,127.25 104.35,127.25 104.35,124.6 103.5,123.75 102.5,123.75 101.013,125.237 101.013,129.55 98.988,129.55 98.688,129.25 96.75,129.25 94,132 84.55,132 82.6,130.05 82.6,128.75 83.35,128 98.5,128 98.987,127.513
"+5 BUCK" on Layer 6 SIG "NONET_L01_P-001" (solid, remove dead copper, pour order 1): 101.825,118.975 102.775,118.975 104.38,117.37 104.38,113.7 104.05,113.37 103.38,113.37 101.825,114.925 101.825,116.825
"+3.3 LDO" on Layer 6 SIG "NONET_L01_P-001" (solid, remove dead copper, pour order 0): 99.525,118.975 100.475,118.975 100.475,116.825 101.625,115.675 101.625,111.025 97.975,111.025 95.62,113.38 95.62,116.3 95.95,116.63 99.33,116.63 99.525,116.825
no net on Bottom Overlay "NONET_L01_P-001" (solid): 125,119.75 120,119.75 ccw(c120,118.25) 118.5,118.25 118.5,116.25 ccw(c120,116.25) 120,114.75 125,114.75
no net on Bottom Overlay "NONET_L01_P-001" (solid): 75,119.75 80,119.75 ccw(c80,121.25) 81.5,121.25 81.5,123.25 ccw(c80,123.25) 80,124.75 75,124.75
GND on Layer 2 GND "NONET_L01_P-001" (solid, remove dead copper, pour order 14): 75,135 125,135 125,65 75,65
GND on Layer 4 SIG PWR "NONET_L01_P-001" (solid, remove dead copper, pour order 34): 75,135 125,135 125,65 75,65
"+5 BUCK" on Layer 4 SIG PWR "+5_BUCK_L04_P029" (solid, remove dead copper, pour order 29): 104.5,126 116.75,113.75 116.75,108.5 114.5,106.25 110.75,106.25 108.5,108.5 108.5,112.25 107.25,113.5 99.5,113.5 96.5,110.5 96.5,88 96.75,87.75 102,87.75 104.5,90.25 104.5,93 109,97.5 119.75,97.5 120.25,97 120.25,82 117,78.75 86.25,78.75 83.25,81.75 83.25,124.25 85,126
"+1.8 LDO" on Layer 4 SIG PWR "NONET_L01_P-001" (solid, remove dead copper, pour order 26): 113.5,99.25 112,97.75 108.75,97.75 104.25,93.25 104.25,90.5 101.75,88 97,88 96.75,88.25 96.75,97.75 101.75,102.75 101.75,109.75 102.5,110.5 106.25,110.5 113.5,103.25
"+5 SERVO" on Layer 4 SIG PWR "+5_SERVO_L04_P032" (solid, remove dead copper, pour order 32): 75,77.75 82,77.75 83,78.75 83,124.5 84.75,126.25 104.75,126.25 117,114 117,102.5 118,101.5 125,101.5 125,135 75,135
GND on Layer 3 SIG PWR "NONET_L01_P-001" (solid, remove dead copper, pour order 33): 75,135 125,135 125,65 75,65
"+5 SERVO" on Layer 3 SIG PWR "+5_SERVO_L03_P031" (solid, remove dead copper, pour order 31): 75,77.75 82,77.75 83,78.75 83,111 89,117 111,117 117,111 117,102.5 118,101.5 125,101.5 125,135 75,135
"+3.3 LDO" on Layer 3 SIG PWR "NONET_L01_P-001" (solid, remove dead copper, pour order 27): 89.25,116.75 83.25,110.75 83.25,65 116.75,65 116.75,110.75 110.75,116.75
GND on Layer 5 GND "NONET_L01_P-001" (solid, remove dead copper, pour order 15): 75,135 125,135 125,65 75,65

## Other copper
Layer 6 SIG:
  region: 109.113,73.151 109.185,73.151 109.185,73.458 108.896,73.458 108.896,73.151 109.094,73.151
  region: 112.724,71.364 113.608,71.364 113.608,71.382 113.717,71.382 113.717,71.4 113.771,71.4 113.771,71.418 113.807,71.418 113.807,71.436 113.825,71.436 113.825,71.454 113.861,71.454 113.861,71.472 113.879,71.472 113.879,71.49 113.897,71.49 113.897,71.526 113.915,71.526 113.915,71.544 113.933,71.544 113.933,71.599 113.951,71.599 113.951,71.653 113.969,71.653 113.969,71.779 113.988,71.779 113.988,72.465 113.969,72.465 113.969,72.592 113.951,72.592 113.951,72.646 113.933,72.646 113.933,72.7 113.915,72.7 113.915,72.718 113.897,72.718 113.897,72.754 113.879,72.754 113.879,72.772 113.861,72.772 113.861,72.79 113.825,72.79 113.825,72.808 113.807,72.808 113.807,72.826 113.771,72.826 113.771,72.844 113.717,72.844 113.717,72.863 113.608,72.863 113.608,72.881 112.994,72.881 112.994,73.494 112.724,73.494 hole: 113.013,72.646 113.572,72.646 113.572,72.628 113.626,72.628 113.626,72.61 113.663,72.61 113.663,72.592 113.681,72.592 113.681,72.556 113.699,72.556 113.699,72.501 113.717,72.501 113.717,72.465 113.717,72.447 113.717,71.761 113.699,71.761 113.699,71.689 113.681,71.689 113.681,71.653 113.663,71.653 113.663,71.635 113.626,71.635 113.626,71.617 113.572,71.617 113.572,71.599 113.013,71.599 113.013,71.617 112.994,71.617 112.994,72.628 113.013,72.628
  region: 177 vertices and 0 holes, not listed, extent 109.564,71.364 110.665,72.881
  region: 275 vertices and 0 holes, not listed, extent 115.432,74.09 118.826,78.622
  region: 111.406,72.863 111.315,72.863 111.315,72.844 111.261,72.844 111.261,72.826 111.225,72.826 111.225,72.808 111.189,72.808 111.189,72.79 111.171,72.79 111.171,72.772 111.153,72.772 111.153,72.754 111.135,72.754 111.135,72.718 111.117,72.718 111.117,72.7 111.099,72.7 111.099,72.664 111.081,72.664 111.081,72.61 111.063,72.61 111.063,72.519 111.044,72.519 111.044,72.014 112.038,72.014 112.038,71.761 112.019,71.761 112.019,71.689 112.001,71.689 112.001,71.671 112.001,71.653 111.983,71.653 111.983,71.635 111.947,71.635 111.947,71.617 111.893,71.617 111.893,71.599 111.099,71.599 111.099,71.472 111.117,71.472 111.117,71.454 111.135,71.454 111.135,71.436 111.153,71.436 111.153,71.418 111.189,71.418 111.189,71.4 111.207,71.4 111.207,71.382 111.225,71.382 111.225,71.364 111.929,71.364 111.929,71.382 112.038,71.382 112.038,71.4 112.092,71.4 112.092,71.418 112.128,71.418 112.128,71.436 112.146,71.436 112.146,71.454 112.182,71.454 112.182,71.472 112.2,71.472 112.2,71.49 112.218,71.49 112.218,71.526 112.236,71.526 112.236,71.544 112.254,71.544 112.254,71.599 112.272,71.599 112.272,71.653 112.29,71.653 112.29,71.779 112.308,71.779 112.308,72.465 112.29,72.465 112.29,72.592 112.272,72.592 112.272,72.646 112.254,72.646 112.254,72.7 112.236,72.7 112.236,72.718 112.218,72.718 112.218,72.754 112.2,72.754 112.2,72.772 112.182,72.772 112.182,72.79 112.146,72.79 112.146,72.808 112.128,72.808 112.128,72.826 112.092,72.826 112.092,72.844 112.038,72.844 112.038,72.863 111.929,72.863 111.929,72.881 111.406,72.881 hole: 111.46,72.646 111.893,72.646 111.893,72.628 111.947,72.628 111.947,72.61 111.983,72.61 111.983,72.592 112.001,72.592 112.001,72.556 112.019,72.556 112.019,72.483 112.038,72.483 112.038,72.231 111.315,72.231 111.315,72.519 111.333,72.519 111.333,72.574 111.351,72.574 111.351,72.592 111.369,72.592 111.369,72.61 111.388,72.61 111.388,72.628 111.46,72.628
  region: 107.217,72.628 107.217,72.61 107.217,71.183 107.235,71.183 107.235,71.057 107.253,71.057 107.253,71.003 107.271,71.003 107.271,70.967 107.289,70.967 107.289,70.949 107.307,70.949 107.307,70.912 107.325,70.912 107.325,70.894 107.343,70.894 107.343,70.876 107.379,70.876 107.379,70.858 107.397,70.858 107.397,70.84 107.433,70.84 107.433,70.822 107.488,70.822 107.488,70.804 107.596,70.804 107.596,70.786 108.228,70.786 108.228,70.804 108.264,70.804 108.264,70.822 108.282,70.822 108.282,70.84 108.3,70.84 108.3,70.858 108.336,70.858 108.336,70.876 108.354,70.876 108.354,71.021 107.632,71.021 107.632,71.039 107.578,71.039 107.578,71.057 107.542,71.057 107.542,71.075 107.524,71.075 107.524,71.111 107.506,71.111 107.506,71.165 107.488,71.165 107.488,71.364 108.119,71.364 108.119,71.382 108.21,71.382 108.21,71.4 108.264,71.4 108.264,71.418 108.3,71.418 108.3,71.436 108.336,71.436 108.336,71.454 108.354,71.454 108.354,71.472 108.372,71.472 108.372,71.49 108.39,71.49 108.39,71.508 108.408,71.508 108.408,71.544 108.426,71.544 108.426,71.581 108.444,71.581 108.444,71.635 108.463,71.635 108.463,71.725 108.481,71.725 108.481,72.519 108.463,72.519 108.463,72.61 108.444,72.61 108.444,72.664 108.426,72.664 108.426,72.7 108.408,72.7 108.408,72.736 108.39,72.736 108.39,72.754 108.372,72.754 108.372,72.772 108.354,72.772 108.354,72.79 108.336,72.79 108.336,72.808 108.3,72.808 108.3,72.826 108.264,72.826 108.264,72.844 108.21,72.844 108.21,72.863 108.119,72.863 108.119,72.881 107.217,72.881 hole: 107.506,72.646 108.065,72.646 108.065,72.628 108.138,72.628 108.138,72.61 108.156,72.61 108.156,72.592 108.174,72.592 108.174,72.574 108.192,72.574 108.192,72.519 108.21,72.519 108.21,71.725 108.192,71.725 108.192,71.671 108.174,71.671 108.174,71.653 108.156,71.653 108.156,71.635 108.138,71.635 108.138,71.617 108.065,71.617 108.065,71.599 107.506,71.599 107.506,71.617 107.488,71.617 107.488,72.628 107.506,72.628
  region: 109.094,72.881 108.896,72.881 108.896,71.364 109.167,71.364 109.167,72.881 109.113,72.881
  region: 106.765,72.05 106.765,72.881 105.881,72.881 105.881,72.863 105.79,72.863 105.79,72.844 105.736,72.844 105.736,72.826 105.7,72.826 105.7,72.808 105.664,72.808 105.664,72.79 105.646,72.79 105.646,72.772 105.628,72.772 105.628,72.754 105.61,72.754 105.61,72.736 105.592,72.736 105.592,72.7 105.574,72.7 105.574,72.682 105.556,72.682 105.556,72.628 105.538,72.628 105.538,72.556 105.519,72.556 105.519,71.364 105.79,71.364 105.79,72.538 105.808,72.538 105.808,72.574 105.826,72.574 105.826,72.592 105.844,72.592 105.844,72.61 105.863,72.61 105.863,72.628 105.917,72.628 105.917,72.646 106.494,72.646 106.494,71.364 106.765,71.364 106.765,72.032
  region: 114.385,76.239 114.385,78.099 114.367,78.099 114.367,78.135 114.349,78.135 114.349,78.171 114.331,78.171 114.331,78.189 114.313,78.189 114.313,78.207 114.294,78.207 114.294,78.225 114.276,78.225 114.276,78.261 114.258,78.261 114.258,78.279 114.24,78.279 114.24,78.297 114.222,78.297 114.222,78.315 114.186,78.315 114.186,78.333 114.168,78.333 114.168,78.351 114.15,78.351 114.15,78.369 114.132,78.369 114.132,78.387 114.096,78.387 114.096,78.406 114.078,78.406 114.078,78.424 114.042,78.424 114.042,78.442 114.006,78.442 114.006,78.46 113.969,78.46 113.969,78.478 113.933,78.478 113.933,78.496 113.897,78.496 113.897,78.514 113.843,78.514 113.843,78.532 113.807,78.532 113.807,78.55 113.735,78.55 113.735,78.568 113.663,78.568 113.663,78.586 113.554,78.586 113.554,78.604 113.374,78.604 113.374,78.622 112.344,78.622 112.344,78.604 112.326,78.604 112.326,78.586 112.29,78.586 112.29,78.568 112.272,78.568 112.272,78.55 112.254,78.55 112.254,78.532 112.218,78.532 112.218,78.514 112.2,78.514 112.2,78.496 112.182,78.496 112.182,78.478 112.146,78.478 112.146,78.46 112.128,78.46 112.128,78.442 112.11,78.442 112.11,78.424 112.074,78.424 112.074,78.406 112.056,78.406 112.056,78.387 112.038,78.387 112.038,78.369 112.001,78.369 112.001,78.351 111.983,78.351 111.983,78.333 111.965,78.333 111.965,77.882 113.265,77.882 113.265,77.864 113.338,77.864 113.338,77.846 113.392,77.846 113.392,77.828 113.428,77.828 113.428,77.81 113.464,77.81 113.464,77.792 113.482,77.792 113.482,77.774 113.5,77.774 113.5,77.756 113.536,77.756 113.536,77.738 113.554,77.738 113.554,74.09 114.385,74.09 114.385,76.221
  region: 519 vertices and 0 holes, not listed, extent 105.501,74.09 108.842,78.622
  region: 110.864,80.5 110.25,80.5 110.25,75.21 110.232,75.21 110.232,75.119 110.214,75.119 110.214,75.083 110.196,75.083 110.196,75.029 110.178,75.029 110.178,75.011 110.16,75.011 110.16,74.975 110.142,74.975 110.142,74.957 110.124,74.957 110.124,74.939 110.106,74.939 110.106,74.903 110.069,74.903 110.069,74.885 110.051,74.885 110.051,74.867 110.033,74.867 110.033,74.849 109.997,74.849 109.997,74.831 109.979,74.831 109.979,74.812 109.925,74.812 109.925,74.794 109.889,74.794 109.889,74.776 109.835,74.776 109.835,74.758 109.726,74.758 109.726,74.74 109.654,74.74 109.654,74.018 109.799,74.018 109.799,74.036 109.997,74.036 109.997,74.054 110.088,74.054 110.088,74.072 110.178,74.072 110.178,74.09 110.232,74.09 110.232,74.108 110.304,74.108 110.304,74.126 110.34,74.126 110.34,74.144 110.394,74.144 110.394,74.163 110.431,74.163 110.431,74.181 110.467,74.181 110.467,74.199 110.503,74.199 110.503,74.217 110.539,74.217 110.539,74.235 110.557,74.235 110.557,74.253 110.593,74.253 110.593,74.271 110.611,74.271 110.611,74.289 110.629,74.289 110.629,74.307 110.665,74.307 110.665,74.325 110.683,74.325 110.683,74.343 110.701,74.343 110.701,74.361 110.719,74.361 110.719,74.379 110.738,74.379 110.738,74.397 110.756,74.397 110.756,74.415 110.774,74.415 110.774,74.433 110.792,74.433 110.792,74.451 110.81,74.451 110.81,74.487 110.828,74.487 110.828,74.506 110.846,74.506 110.846,74.524 110.864,74.524 110.864,74.56 110.882,74.56 110.882,74.596 110.9,74.596 110.9,74.614 110.918,74.614 110.918,74.65 110.936,74.65 110.936,74.686 110.954,74.686 110.954,74.74 110.972,74.74 110.972,74.776 110.99,74.776 110.99,74.831 111.008,74.831 111.008,74.885 111.026,74.885 111.026,74.957 111.044,74.957 111.044,75.047 111.063,75.047 111.063,75.174 111.081,75.174 111.081,80.5 110.882,80.5
Multi-Layer:
  pour cut-out: 75,72 78.5,72 cw(c78.5,68.5) 82,68.5 82,65 75,65
  pour cut-out: 118,65 118,68.5 cw(c121.5,68.5) 121.5,72 125,72 125,65
  pour cut-out: 125,128 121.5,128 cw(c121.5,131.5) 118,131.5 118,135 125,135
  pour cut-out: 82,135 82,131.5 cw(c78.5,131.5) 78.5,128 75,128 75,135

## Silkscreen, mask and mechanical layers (free items; w line width, h text height)
Top Overlay:
  drawing of 25 lines, arcs and shapes, not listed
  text "SERVO" at 81.917,123.483 h2 r270
  text "2..12 S" at 118.015,116.322 h2 r90
  text "5" at 75.5,112.25 h2.5
  text "4" at 122.5,112.25 h2.5
  text "8" at 75.5,99.25 h2.5
  text "1" at 122.5,99.25 h2.5
  text "9" at 80.5,98.75 h2.5
  text "I2C 2" at 90.4,82.418 h2
  text "CAN 2" at 85.433,80.418 h2
  text "SER 3" at 85.456,78.418 h2
  text "SER 7" at 104.206,78.418 h2
  text "SER 4" at 85.456,76.417 h2
  text "SER 2" at 109.206,76.418 h2
  text "16" at 79.75,75.5 h2.5
  text "SER 8" at 109.206,74.418 h2
  text "CAN 1" at 109.183,72.485 h2
  text "SWD" at 104.206,70.418 h2
Bottom Overlay:
  circle w0.3: c121.5,131.5 r2.5
  circle w0.3: c78.5,131.5 r2.5
  circle w0.3: c121.5,68.5 r2.5
  circle w0.3: c78.5,68.5 r2.5
  pour cut-out: 76,123.25 cw(c77,123.25) 77,124.25 80,124.25 cw(c80,123.25) 81,123.25 81,121.25 cw(c80,121.25) 80,120.25 77,120.25 cw(c77,121.25) 76,121.25
  pour cut-out: 119,118.25 cw(c120,118.25) 120,119.25 123,119.25 cw(c123,118.25) 124,118.25 124,116.25 cw(c123,116.25) 123,115.25 120,115.25 cw(c120,116.25) 119,116.25
  lines w0.2: 94.5,90.25 95,90.75 ; 94.5,90.75 95,90.25 ; 94.75,91 94.5,91.25 ; 94.75,91.5 94.5,91.25 ; 95.75,92.5 96,92.75 ; 96.25,92.5 96,92.75 ; 96.5,92.75 96.75,92.5 ; 96.5,106.25 96.75,106 ; 96.75,92.25 96.75,92.5 ; 96.75,105.75 96.75,106 ; 97,92.75 96.75,92.5 ; 97,106.25 96.75,106 ; 97.25,106 97.5,105.75 ; 97.75,106 97.5,105.75 ; 98.5,107.75 99,108.25 ; 98.5,108.25 99,107.75 ; 98.75,107 99,107.25 ; 98.75,107.5 99,107.25 ; 103.75,101.25 104,101 ; 104,100 103.75,100.25 ; 104,100.5 103.75,100.25 ; 104,100.75 104,101 ; 104.25,101.25 104,101 ; 105,99 105.25,98.75 ; 105.5,99 105.25,98.75 ; 105.75,98.75 106.25,99.25 ; 105.75,99.25 106.25,98.75 ; 94.5,91.25 96,91.25 96,92.75 ; 97.5,105.75 97.5,107.25 99,107.25 ; 103.75,100.25 105.25,100.25 105.25,98.75
  text "SPI 4" at 107.057,106.563 h1.5
  text "SPI 2" at 110.061,102.314 h1.5
  text "SPI 3" at 101.034,93.064 h1.5
Mechanical 1:
  the board outline again, w0.1